# EAGLE board cc_power_supply (EAGLE 6.5.0)
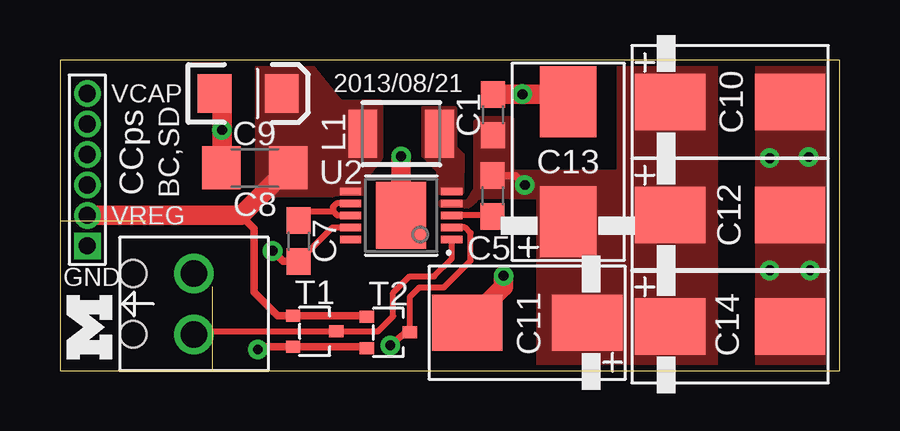
[diagram p0: board, top side]
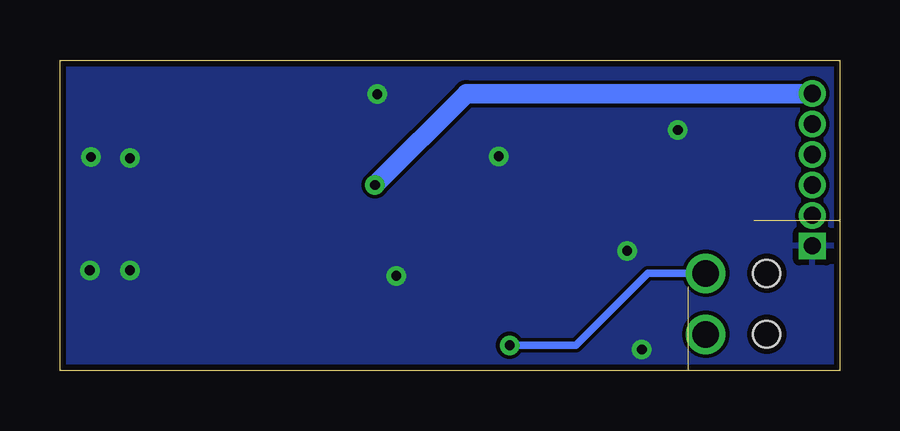
[diagram p1: board, bottom side, seen from below]

Size 32.51 x 12.95 mm. Coordinates in mm from the lower left corner, seen from the top.
Outline: 0,0 32.51,0 32.51,12.95 0,12.95 0,0
Copper layers (1*16): Top 0.0178mm / dielectric 59mil / Bottom 0.0178mm
Design rules "sunstone-2lyr_v1.0.0.3 *": minimum track width 6mil, minimum drill 14mil, track to track 6mil, track to pad 6mil, pad to pad 6mil, via to via 6mil, smd to smd 6mil, copper to edge 10mil, drill to drill 16mil, minimum pad ring 8mil, minimum via ring 8mil, stop-mask expansion 3mil, vias tented up to drill 20mil, thermal gap 10mil
Milling: 2 lines

## Footprints (pad centres in the part's own frame; a part is rotated, then mirrored left to right if it is on the bottom)
C0603 = smd 1.1 x 1: 1 -0.85,0; 2 0.85,0
C1206 = smd 1.6 x 1.8: 1 -1.4,0; 2 1.4,0
EIA3216 = smd 1.4 x 1.6: A 1.4,0; C -1.4,0
2917_CAP_POL = smd 2.95 x 2.35: + -2.5,0; - 2.5,0
CONN_BLOCK_2 = drill 1.1: 1 -1.27,0; 2 1.27,0 | hole 1.12: -1.27,-2.54; 1.27,-2.54
HEADER1X6/0.05IN = drill 0.711 pad 1.016 square: 1 -2.54,0 | drill 0.711 pad 1.016: 2 -1.27,0; 3 0,0; 4 1.27,0; 5 2.54,0; 6 3.81,0
1210 = smd 1.2 x 2: 1 -1.6,0; 2 1.6,0
NCHAN_MOSFET = smd 0.6 x 0.5: D -0.9,0; G 0.9,-0.65; S 0.9,0.65
MSOP-10-GNDPAD = smd 0.305 x 0.889: 1 -1,-2.11; 2 -0.5,-2.11; 3 0,-2.11; 4 0.5,-2.11; 5 1,-2.11; 6 1,2.11; 7 0.5,2.11; 8 0,2.11; 9 -0.5,2.11; 10 -1,2.11 | smd 2.794 x 2.083: GND 0,0

## Placement (x,y rotation side)
C1  0.1uF  [C0603]  18.06,10.67 90 top
C5  1uF  [C0603]  18.03,7.29 270 top
C7  4.7uF  [C0603]  9.94,5.41 270 top
C8  10uF  [C1206]  8.13,8.46 180 top
C9  47uF  [EIA3216]  7.85,11.56 0 top
C10  100uF 25V  [2917_CAP_POL]  27.94,11.2 0 top
C11  100uF 25V  [2917_CAP_POL]  19.48,2.01 180 top
C12  100uF 25V  [2917_CAP_POL]  27.94,6.5 0 top
C13  100uF 25V  [2917_CAP_POL]  21.18,8.71 90 top
C14  100uF 25V  [2917_CAP_POL]  27.94,1.85 0 top
J1  SCREW-TERMINAL_2_0.100  [CONN_BLOCK_2]  5.59,2.79 270 top
J2  GECKO_POWER_SUPPLY_CONN  [HEADER1X6/0.05IN]  1.14,7.75 90 top
L1  10uH  [1210]  14.22,9.88 180 top
T1  NCHAN_MOSFET  [NCHAN_MOSFET]  10.62,1.65 180 top
T2  NCHAN_MOSFET  [NCHAN_MOSFET]  13.69,1.6 180 top
U2  LTC3588_  [MSOP-10-GNDPAD]  14.22,6.48 90 top
U$2  UMICH_SOLID_SMALL  [UMICH_SOLID_75MIL]  2.18,0.48 90 top

## Library data of the parts
C1 = rcl; DIGIKEY: 445-1316-1-ND
C5 = rcl; DIGIKEY: 445-1321-1-ND
C7 = rcl; DIGIKEY: 445-5178-1-ND
C8 = rcl; DIGIKEY: 399-8152-1-ND
C9 = SparkFun-Passives; DIGIKEY: 399-3700-1-ND
C10-C14 = coilcube; DIGIKEY: 399-5175-1-ND
J1 = headers; DIGIKEY: 277-1273-ND
J2 = gecko
L1 = SparkFun-Passives; DIGIKEY: 587-1625-1-ND
T1 T2 = Power_Metering; DIGIKEY: SI1302DL-T1-GE3CT-ND
U2 = SparkFun-PowerIC; DIGIKEY: LTC3588EMSE-1#PBF-ND
U$2 = logos

## Nets
+3V3: C8.1 C9.A J2.2 L1.2 T1.G T2.G U2.6
GND: C1.2 C7.2 C8.2 C9.C C10.- C11.- C12.- C13.- C14.- J2.1 T1.S T2.S U2.9 U2.GND
N$20: L1.1 U2.5
N$22: C5.2 U2.3
OVERVOLT: J2.5
PGOOD: U2.10
PZ1: J1.2 T1.D U2.1
PZ2: J1.1 T2.D U2.2
SHUTDOWN: J2.4
TRIGGER: J2.3
VCAP: C1.1 C5.1 C10.+ C11.+ C12.+ C13.+ C14.+ J2.6 U2.4
VIN2: C7.1 U2.7 U2.8

## Tracks (layer width: path | path; a pad name or v marks a point on that pad's centre or on a via)
+3V3
  Top 0.254: T2.G 12.74,2.3
  Top 0.305: 12.74,2.3 T1.G 9.08,2.3 8.1,3.28 8.1,5.92 7.55,6.48
  Top 0.813: J2.2 7.55,6.48 C8.1
  pour Top (no thermals): 8.26,12.7 10.46,12.67 11.66,11.2 13.34,11.2 13.34,8.89 12.62,7.95 12.62,7.34 8.26,7.34
GND  (via drill 0.41 pad 0.3)
  Top 0.254: C7.2 11.36,5.98 U2.9
  Top 0.305: T2.S 12.74,1 T1.S 8.37,1 v8.26,0.89 | C7.2 9.31,4.56 v8.87,5
  Top 0.813: C11.- 18.49,3.52 v18.49,3.96 | C13.- 20.95,11.52 19.29,11.52 v19.28,11.53 18.07,11.53 C1.2 | U2.GND v14.22,8.94 | C8.2 6.75,8.48 v6.75,10.03 v6.76,10.03 v6.75,10.04 6.75,11.25 C9.C
  other vias: 29.59,8.86 31.22,8.92 31.27,4.19 29.59,4.19
  pour Top (rank 5, no thermals): 29.11,12.93 31.8,12.93 31.8,-0.03 29.11,-0.03
  pour Bottom: -0.64,13.34 33.02,13.34 33.02,-0.64 -0.64,-0.64
N$20
  pour Top (no thermals): 15.79,7.45 16.74,7.45 16.76,8.97 16.45,9.28 16.45,10.91 15.18,10.91 15.18,9 15.81,8.37
N$22
  Top 0.254: C5.2 18,6.48 U2.3
PZ1
  Top 0.254: J1.2 5.71,1.65 T1.D 13.26,1.65 13.89,2.29 13.89,3.25 14.58,3.94 15.6,3.94 16.33,4.67 U2.1
PZ2  (via drill 0.41 pad 0.3)
  Top 0.254: T2.D 14.59,3.08 14.99,3.48 16,3.48 17.12,4.6 17.12,5.74 16.88,5.98 U2.2
  Top 0.305: T2.D 14.43,1.6 v13.77,1.07
  Bottom 0.305: J1.1 8,4.06 11,1.07 v13.77,1.07
VCAP  (via drill 0.41 pad 0.3)
  Top 0.305: v19.38,7.75 18.99,8.14 C5.1
  Bottom 0.813: v19.38,7.75 15.57,11.56 J2.6
  pour Top (no thermals): 27.33,12.95 23.32,12.95 23.32,8.26 18.82,8.26 18.82,10.49 17.48,10.49 17.48,10.36 17.35,10.36 17.35,7.57 16.99,7.01 15.9,7.01 15.9,6.91 17.04,6.91 17.5,7.29 19.96,7.26 19.96,0.03 27.33,0.03
VIN2
  Top 0.254: U2.7 11.52,6.98 11.38,6.83 11.38,6.66 | 11.38,6.66 11.56,6.48 U2.8 | C7.1 10.34,6.66 11.38,6.66

## Text on the board
tPlace: VCAP | 2013/08/21 | CCps | BC,SD | VREG | GND